# Altium PCB touch-1ch-sp.PcbDoc (part 3 of 3)
Units mm, origin at the board's own origin, x right, y up, seen from the top; angles counter-clockwise.
Board outline 151 x 86.38 mm, 2 copper layers (Top Layer, Bottom Layer); 26 components, 28 nets, 76 pads, 0 vias.
Unrouted connection lines stored in the file: 1.
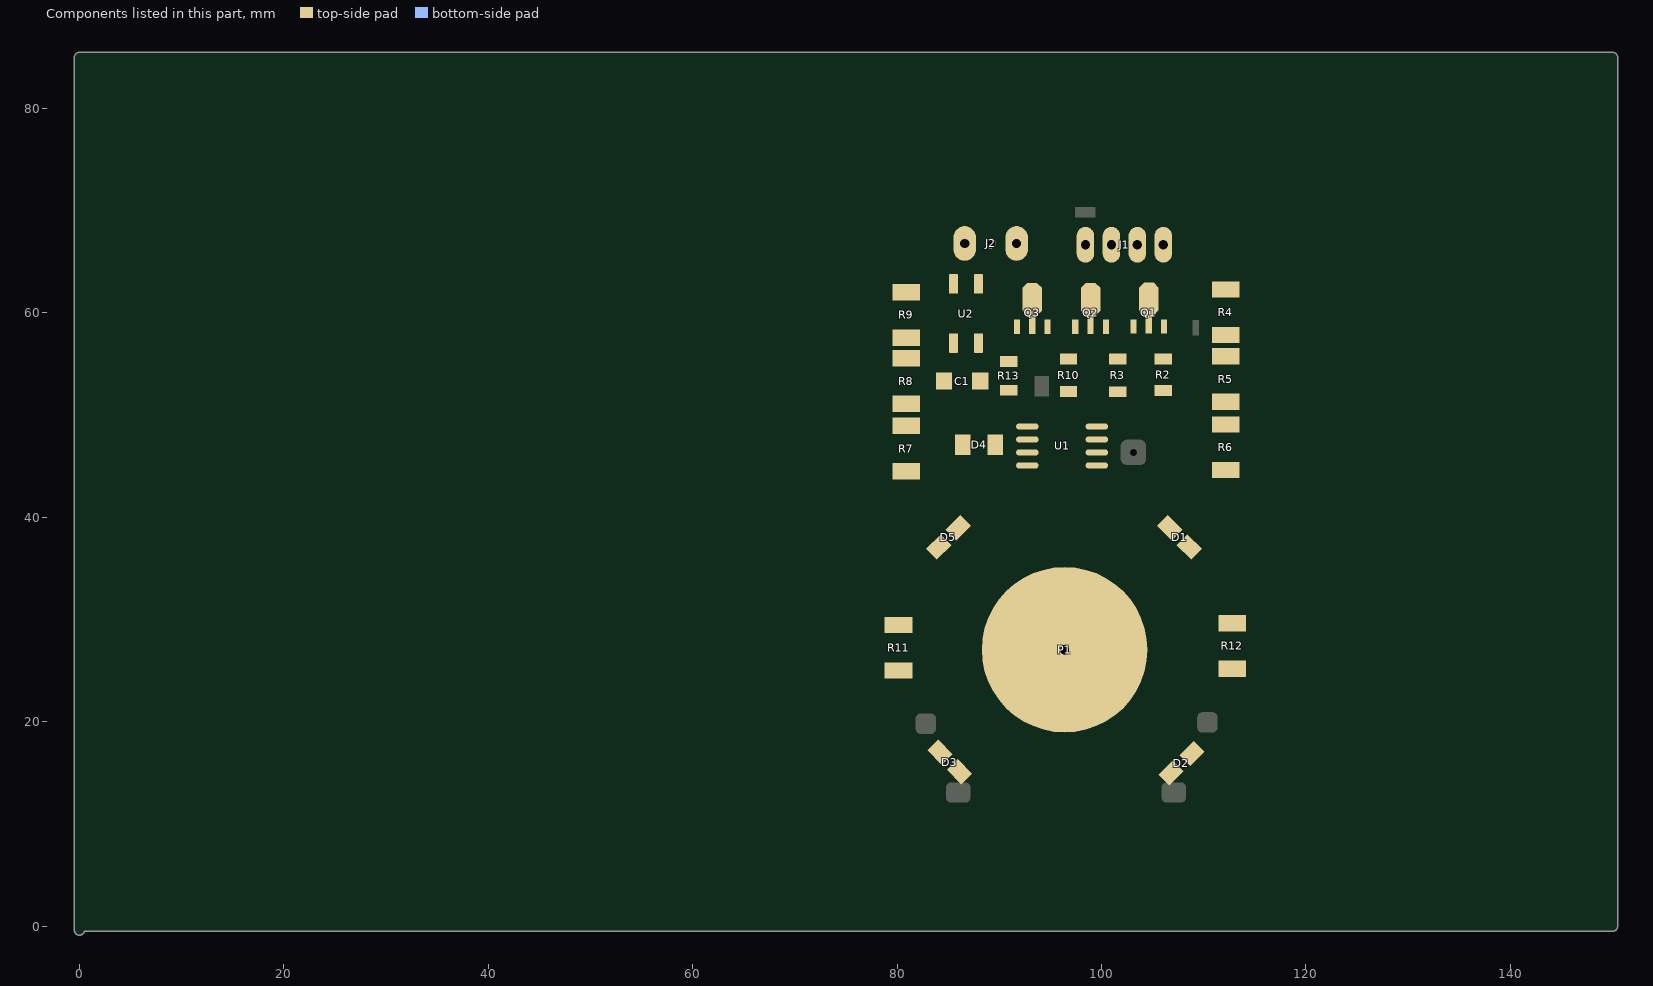
[diagram p3: the components of this part, seen from the top]

## Nets (pads, with @x,y where several pads share a name; then routed paths per layer and width w, separated by ;. In a path a pad name is that pad's centre, name@x,y a point inside that pad or via, vN(x,y) a via of type N, cw(c..) or ccw(c..) an arc to the next point about the centre after c; other vN are vias at no path point) (continued)
copper on no net: (continued)
  Top Layer w0.5: 49.714,6.006 49.714,6.004 49.714,6.003 49.714,6.001 49.714,5.999 49.714,5.998 49.714,5.996 49.714,5.995 49.714,5.993 49.714,5.992 49.714,5.99 49.714,5.989 49.714,5.987 49.714,5.986 49.714,5.984 49.714,5.982 49.714,5.981 49.714,5.979 49.714,5.978 49.714,5.976 49.714,5.975 49.714,5.973 49.714,5.972 49.714,5.97 49.714,5.969 49.713,5.967 49.713,5.966 49.713,5.964 49.713,5.963 49.713,5.961 49.713,5.96 49.713,5.958 49.713,5.957 49.713,5.955 49.713,5.954 49.713,5.952 49.713,5.951 49.713,5.949 49.713,5.948 49.713,5.946 49.713,5.945 49.713,5.943 49.713,5.942 49.713,5.94 49.713,5.939 49.713,5.937 49.713,5.936 49.713,5.934 49.713,5.933 49.713,5.932 49.713,5.93 49.713,5.929 49.713,5.927 49.712,5.926 49.712,5.924 49.712,5.923 49.712,5.921 49.712,5.92 49.712,5.919 49.712,5.917 49.712,5.916 49.712,5.914 49.712,5.913 49.712,5.911 49.712,5.91 49.712,5.909 49.712,5.907 49.712,5.906 49.712,5.904 49.712,5.903 49.712,5.901 49.712,5.9 49.712,5.899 49.712,5.897 49.712,5.896 49.712,5.894 49.712,5.893 49.712,5.892 49.712,5.89 49.712,5.889 49.712,5.887 49.712,5.886 49.712,5.885 49.712,5.883 49.712,5.882 49.711,5.881 49.711,5.879 49.711,5.878 49.711,5.876 49.711,5.875 49.711,5.874 49.711,5.872 49.711,5.871 49.711,5.87 49.711,5.868 49.711,5.867 49.711,5.866 49.711,5.864 49.711,5.863 49.711,5.861 49.711,5.857 49.711,5.851 49.711,5.844 49.711,5.838 49.711,5.832 49.71,5.825 49.71,5.819 49.71,5.813 49.71,5.807 49.71,5.8 49.71,5.794 49.71,5.788 49.709,5.782 49.709,5.775 49.709,5.769 49.709,5.763 49.709,5.756 49.709,5.75 49.709,5.744 49.708,5.737 49.708,5.731 49.708,5.725 49.708,5.719 49.708,5.712 49.708,5.706 49.707,5.7 49.707,5.693 49.707,5.687 49.707,5.681 49.707,5.674 49.707,5.668 49.707,5.662 49.706,5.656 49.706,5.649 49.706,5.643 49.706,5.637 49.706,5.63 49.706,5.624 49.705,5.62 49.705,5.616 49.705,5.611 49.705,5.607 49.705,5.603 49.705,5.599 49.705,5.594 49.705,5.59 49.704,5.586 49.704,5.582 49.704,5.578 49.704,5.573 49.704,5.569 49.704,5.565 49.704,5.561 49.704,5.557 49.703,5.552 49.703,5.548 49.703,5.544 49.703,5.54 49.703,5.535 49.703,5.531 49.703,5.527 49.703,5.523 49.702,5.519 49.702,5.514 49.702,5.51 49.702,5.506 49.702,5.502 49.702,5.497 49.702,5.493 49.702,5.489 49.701,5.485 49.701,5.481 49.701,5.476 49.701,5.472 49.701,5.468 49.701,5.464 49.701,5.459 49.701,5.455 49.7,5.451 49.7,5.447 49.7,5.442 49.7,5.438 49.7,5.434 49.7,5.43 49.7,5.426 49.7,5.421 49.699,5.417 49.699,5.413 49.699,5.409 49.699,5.404 49.699,5.4 49.699,5.396 49.699,5.394 49.699,5.392 49.699,5.39 49.698,5.387 49.698,5.385 49.698,5.383 49.698,5.381 49.698,5.379 49.698,5.377 49.698,5.375 49.698,5.373 49.698,5.37 49.698,5.368 49.698,5.366 49.698,5.364 49.698,5.362 49.698,5.36 49.698,5.358 49.697,5.356 49.697,5.354 49.697,5.351 49.697,5.349 49.697,5.347 49.697,5.345 49.697,5.343 49.697,5.341 49.697,5.339 49.697,5.337 49.697,5.334 49.697,5.332 49.697,5.33 49.697,5.328 49.696,5.326 49.696,5.324 49.696,5.322 49.696,5.32 49.696,5.317 49.696,5.315 49.696,5.313 49.696,5.311 49.696,5.309 49.696,5.307 49.696,5.305 49.696,5.303 49.696,5.301 49.696,5.298 49.696,5.296 49.695,5.294 49.695,5.292 49.695,5.29 49.695,5.288 49.695,5.286 49.695,5.284 49.695,5.281 49.695,5.279 49.695,5.277 49.695,5.275 49.695,5.273 49.695,5.271 49.695,5.269 49.695,5.267 49.694,5.264 49.694,5.262 49.694,5.26 49.694,5.258 49.694,5.256 49.694,5.254 49.694,5.252 49.694,5.25 49.694,5.247 49.694,5.245 49.694,5.243 49.694,5.241 49.694,5.239 49.694,5.237 49.694,5.235 49.693,5.233 49.693,5.23 49.693,5.228 49.693,5.226 49.693,5.224 49.693,5.222 49.693,5.22 49.693,5.218 49.693,5.216 49.693,5.213 49.693,5.211 49.693,5.209 49.693,5.207 49.693,5.205 49.692,5.203 49.692,5.201 49.692,5.199 49.692,5.196 49.692,5.194 49.692,5.192 49.692,5.19 49.692,5.188 49.692,5.186 49.692,5.184 49.692,5.182 49.692,5.18 49.692,5.177 49.692,5.175 49.691,5.173 49.691,5.171 49.691,5.169 49.691,5.167 49.691,5.165 49.691,5.163 49.691,5.16 49.691,5.158 49.691,5.156 49.691,5.154 49.691,5.152 49.691,5.15 49.691,5.148 49.691,5.146 49.691,5.143 49.69,5.141 49.69,5.139 49.69,5.137 49.69,5.135 49.69,5.133 49.69,5.131 49.69,5.128 49.69,5.126 49.69,5.124 49.69,5.122 49.69,5.12 49.69,5.118 49.69,5.116 49.69,5.114 49.689,5.111 49.689,5.109 49.689,5.107 49.689,5.105 49.689,5.103 49.689,5.101 49.689,5.099 49.689,5.097 49.689,5.094 49.689,5.092 49.689,5.09 49.689,5.088 49.689,5.086 49.689,5.084 49.688,5.082 49.688,5.08 49.688,5.077 49.688,5.075 49.688,5.073 49.688,5.071 49.688,5.069 49.688,5.067 49.688,5.065 49.688,5.063 49.688,5.06 49.688,5.058 49.688,5.056 49.688,5.054 49.688,5.052 49.687,5.05 49.687,5.048 49.687,5.046 49.687,5.043 49.687,5.041 49.687,5.039 49.687,5.037 49.687,5.035 49.687,5.033 49.687,5.031 49.687,5.029 49.687,5.026 49.687,5.024 49.687,5.022 49.686,5.02 49.686,5.018 49.686,5.016 49.686,5.014 49.686,5.012 49.686,5.009 49.686,5.007 49.686,5.005 49.686,5.003 49.686,5.001 49.686,4.999 49.686,4.997 49.686,4.994 49.686,4.992 49.686,4.99 49.685,4.988 49.685,4.986 49.685,4.984 49.685,4.982 49.685,4.98 49.685,4.977 49.685,4.975 49.685,4.973 49.685,4.971 49.685,4.967 49.685,4.963 49.685,4.958 49.684,4.954 49.684,4.95 49.684,4.946 49.684,4.941 49.684,4.937 49.684,4.933 49.684,4.929 49.683,4.924 49.683,4.92 49.683,4.916 49.683,4.911 49.683,4.907 49.683,4.903 49.683,4.899 49.683,4.894 49.682,4.89 49.682,4.886 49.682,4.882 49.682,4.877 49.682,4.873 49.682,4.869 49.682,4.865 49.681,4.86 49.681,4.856 49.681,4.852 49.681,4.848 49.681,4.843 49.681,4.839 49.681,4.835 49.681,4.831 49.68,4.826 49.68,4.822 49.68,4.818 49.68,4.814 49.68,4.809 49.68,4.805 49.68,4.801 49.68,4.797 49.679,4.792 49.679,4.788 49.679,4.784 49.679,4.779 49.679,4.775 49.679,4.771 49.679,4.767 49.679,4.762 49.679,4.758 49.678,4.754 49.678,4.748 49.678,4.741 49.678,4.735 49.678,4.728 49.678,4.722 49.677,4.716 49.677,4.709 49.677,4.703 49.677,4.696 49.677,4.69 49.677,4.684 49.676,4.677 49.676,4.671 49.676,4.665 49.676,4.658 49.676,4.652 49.676,4.645 49.675,4.639 49.675,4.633 49.675,4.626 49.675,4.62 49.675,4.614 49.675,4.607 49.674,4.601 49.674,4.594 49.674,4.588 49.674,4.582 49.674,4.575 49.674,4.569 49.674,4.562 49.673,4.556 49.673,4.55 49.673,4.543 49.673,4.537 49.673,4.531 49.673,4.522 49.673,4.514 49.672,4.505 49.672,4.497 49.672,4.488 49.672,4.48 49.672,4.471 49.672,4.463 49.671,4.454 49.671,4.446 49.671,4.437 49.671,4.429 49.671,4.42 49.671,4.412 49.671,4.403 49.67,4.395 49.67,4.386 49.67,4.378 49.67,4.369 49.67,4.361 49.67,4.352 49.67,4.344 49.67,4.335 49.67,4.327 49.669,4.318 49.669,4.31 49.669,4.302 49.669,4.293 49.669,4.285 49.669,4.274 49.669,4.263 49.669,4.253 49.669,4.242 49.669,4.232 49.669,4.221 49.668,4.211 49.668,4.2 49.668,4.189 49.668,4.179 49.668,4.168 49.668,4.158 49.668,4.147 49.668,4.137 49.668,4.126 49.668,4.116 ccw(c65.585,4.11) 49.668,4.105 49.668,4.095 49.668,4.084 49.668,4.073 49.668,4.063 49.668,4.052 49.668,4.042 49.668,4.031 49.668,4.021 49.668,4.01 49.669,4 49.669,3.987 49.669,3.975 49.669,3.962 49.669,3.95 49.669,3.937 49.669,3.924 49.669,3.912 49.67,3.899 49.67,3.887 49.67,3.874 49.67,3.862 49.67,3.849 49.671,3.837 49.671,3.824 49.671,3.811 49.671,3.799 49.672,3.786 49.672,3.774 49.672,3.761 49.673,3.747 49.674,3.704 ccw(c53.661,3.855) 49.678,3.626 ccw(c53.618,3.852) 49.683,3.548 ccw(c53.578,3.849) 49.69,3.471 ccw(c53.538,3.845) 49.699,3.388 ccw(c53.498,3.84) 49.709,3.307 ccw(c53.46,3.835) 49.723,3.22 ccw(c53.42,3.828) 49.739,3.128 ccw(c53.382,3.821) 49.757,3.038 ccw(c53.345,3.813) 49.779,2.943 ccw(c53.309,3.804) 49.805,2.843 ccw(c53.273,3.794) 49.835,2.74 ccw(c53.238,3.784) 49.87,2.633 ccw(c53.204,3.772) 49.911,2.517 ccw(c53.17,3.759) 49.961,2.393 ccw(c53.137,3.745) 50.023,2.258 ccw(c53.105,3.73) 50.097,2.111 ccw(c53.074,3.713) 50.192,1.946 ccw(c53.045,3.695) 50.324,1.747 ccw(c53.001,3.662) 51.138,0.948 ccw(c53.012,3.679) 51.433,0.768 ccw(c53.029,3.709) 51.632,0.668 ccw(c53.043,3.74) 51.798,0.597 ccw(c53.056,3.772) 51.942,0.544 ccw(c53.067,3.805) 52.075,0.501 ccw(c53.077,3.839) 52.193,0.468 ccw(c53.086,3.874) 52.302,0.441 ccw(c53.094,3.909) 52.408,0.419 ccw(c53.102,3.945) 52.509,0.4 ccw(c53.108,3.983) 52.605,0.386 ccw(c53.113,4.02) 52.697,0.374 ccw(c53.118,4.059) 52.784,0.365 ccw(c53.121,4.096) 52.865,0.359 ccw(c53.124,4.135) 52.948,0.354 ccw(c53.125,4.174) 53.025,0.351 ccw(c53.126,4.214) 53.102,0.35 ccw(c53.127,4.254) 53.174,0.35 ccw(c53.126,4.294) 53.247,0.352 ccw(c53.125,4.338) 53.325,0.355 ccw(c53.149,3.851) 53.399,0.359 ccw(c53.152,3.821) 53.51,0.369 ccw(c53.155,3.786) 53.638,0.385 ccw(c53.16,3.751) 53.788,0.409 ccw(c53.176,3.679) 54.853,0.806 ccw(c53.157,3.712) 55.028,0.916 ccw(c53.138,3.741) 55.16,1.009 ccw(c53.117,3.769) 55.271,1.094 ccw(c53.095,3.796) 55.366,1.174 ccw(c53.072,3.823) 55.45,1.249 ccw(c53.048,3.848) 55.527,1.322 ccw(c53.023,3.874) 55.597,1.393 ccw(c52.997,3.899) 55.662,1.462 ccw(c52.97,3.924) 55.726,1.534 55.748,1.559 55.768,1.585 55.782,1.602 55.824,1.656 55.866,1.71 55.908,1.764 55.951,1.817 55.993,1.871 56.035,1.925 56.077,1.978 56.119,2.032 56.161,2.086 56.203,2.139 56.245,2.193 56.288,2.247 56.33,2.301 56.372,2.354 56.4,2.39 56.428,2.426 56.456,2.462 56.484,2.497 56.512,2.533 56.54,2.569 56.568,2.605 56.596,2.641 56.625,2.676 56.653,2.712 56.681,2.748 56.709,2.784 56.737,2.82 56.765,2.855 56.793,2.891 56.821,2.927 56.849,2.963 56.877,2.999 56.905,3.034 56.933,3.07 56.961,3.106 56.99,3.142 57.018,3.178 57.046,3.214 57.074,3.249 57.102,3.285 57.13,3.321 57.158,3.357 57.186,3.393 57.214,3.428 57.242,3.464 57.27,3.5 57.298,3.536 57.326,3.572 57.354,3.607 57.383,3.643 57.411,3.679 57.439,3.715 57.467,3.751 57.495,3.786 57.523,3.822 57.551,3.858 57.579,3.894 57.607,3.93 57.635,3.966 57.663,4.001 57.691,4.037 57.719,4.073 57.747,4.109 57.775,4.145 57.79,4.163 57.804,4.18 57.818,4.198 57.832,4.216 57.846,4.234 57.86,4.252 57.874,4.27 57.888,4.288 57.902,4.306 57.916,4.324 57.93,4.342 57.944,4.36 57.958,4.377 57.972,4.395 57.986,4.413 58,4.431 58.014,4.449 58.028,4.467 58.042,4.485 58.056,4.503 58.07,4.521 58.084,4.539 58.098,4.557 58.112,4.574 58.126,4.592 58.14,4.61 58.154,4.628 58.168,4.646 58.182,4.664 58.196,4.682 58.21,4.7 58.224,4.718 58.239,4.736 58.253,4.754 58.267,4.771 58.281,4.789 58.295,4.807 58.309,4.825 58.323,4.843 58.337,4.861 58.351,4.879 58.365,4.897 58.379,4.915 58.393,4.933 58.407,4.951 58.421,4.968 58.435,4.986 58.449,5.004 58.463,5.022 58.477,5.04 58.491,5.058 58.505,5.076 58.519,5.094 58.533,5.112 58.547,5.13 58.561,5.148 58.575,5.165 58.589,5.183 58.603,5.201 58.617,5.219 58.631,5.237 58.645,5.255 58.659,5.273 58.673,5.291 58.687,5.309 58.702,5.327 58.716,5.345 58.73,5.362 58.744,5.38 58.758,5.398 58.772,5.416 58.786,5.434 58.8,5.452 58.814,5.47 58.828,5.488 58.842,5.506 58.856,5.524 58.87,5.542 58.884,5.559 58.898,5.577 58.912,5.595 58.926,5.613 58.94,5.631 58.954,5.649 58.968,5.667 58.982,5.685 58.996,5.703 59.01,5.721 59.024,5.739 59.038,5.756 59.052,5.774 59.066,5.792 59.08,5.81 59.094,5.828 59.108,5.846 59.122,5.864 59.136,5.882 59.15,5.9 59.164,5.918 59.179,5.936 59.193,5.953 59.207,5.971 59.221,5.989 59.235,6.007 59.249,6.025 59.263,6.043 59.277,6.061 59.291,6.079 59.305,6.097 59.319,6.115 59.333,6.133 59.347,6.151 59.361,6.168 59.375,6.186 59.389,6.204 59.403,6.222 59.417,6.24 59.431,6.258 59.445,6.276 59.459,6.294 59.473,6.312 59.487,6.33 59.501,6.348 59.515,6.365 59.529,6.383 59.543,6.401 59.557,6.419 59.571,6.437 59.585,6.455 59.599,6.473 59.613,6.491 59.627,6.509 59.641,6.527 59.656,6.545 59.67,6.562 59.684,6.58 59.698,6.598 59.712,6.616 59.726,6.634 59.74,6.652 59.754,6.67 59.768,6.688 59.782,6.706 59.796,6.724 59.81,6.742 59.824,6.759 59.838,6.777 59.852,6.795 59.866,6.813 59.88,6.831 59.894,6.849 59.908,6.867 59.922,6.885 59.936,6.903 59.95,6.921 59.964,6.939 59.978,6.956 59.992,6.974 60.006,6.992 60.02,7.01 60.034,7.028 60.048,7.046 60.062,7.064 60.076,7.082 60.09,7.1 60.104,7.118 60.118,7.136 60.133,7.153 60.147,7.171 60.161,7.189 60.175,7.207 60.189,7.225 60.203,7.243 60.217,7.261 60.231,7.279 60.245,7.297 60.259,7.315 60.273,7.333 60.287,7.35 60.301,7.368 60.315,7.386 60.329,7.404 60.343,7.422 60.357,7.44 60.371,7.458 60.385,7.476 60.399,7.494 60.413,7.512 60.427,7.53 60.441,7.547 60.455,7.565 60.469,7.583 60.483,7.601 60.497,7.619 60.511,7.637 60.525,7.655 60.539,7.673 60.553,7.691 60.568,7.709 60.582,7.727 60.61,7.762 60.638,7.798 60.666,7.834 60.694,7.87 60.722,7.906 60.75,7.941 60.778,7.977 60.806,8.013 60.834,8.049 60.862,8.085 60.89,8.12 60.918,8.156 60.946,8.192 60.974,8.228 61.003,8.264 61.031,8.3 61.059,8.335 61.087,8.371 61.115,8.407 61.143,8.443 61.171,8.479 61.199,8.514 61.227,8.55 61.255,8.586 61.283,8.622 61.311,8.658 61.339,8.693 61.367,8.729 61.396,8.765 61.424,8.801 61.452,8.837 61.48,8.873 61.508,8.908 61.536,8.944 61.564,8.98 61.592,9.016 61.62,9.052 61.648,9.087 61.676,9.123 61.704,9.159 61.732,9.195 61.761,9.231 61.789,9.266 61.817,9.302 61.845,9.338 61.873,9.374 61.901,9.41 61.929,9.445 61.957,9.481 61.985,9.517 62.027,9.571 62.069,9.624 62.112,9.678 62.154,9.732 62.196,9.785 62.238,9.839 62.28,9.893 62.322,9.947 62.364,10 62.407,10.054 62.449,10.108 62.491,10.161 62.533,10.215 62.575,10.269 62.617,10.322 62.659,10.376 62.702,10.43 62.744,10.483 62.786,10.537 62.828,10.591 62.87,10.644 62.912,10.698 62.954,10.752 62.997,10.806 63.039,10.859 63.081,10.913 63.123,10.967 63.165,11.02 63.207,11.074 63.25,11.128 63.292,11.181 63.334,11.235 63.376,11.289 63.432,11.36 63.489,11.432 63.545,11.503 63.601,11.575 63.657,11.646 63.714,11.718 63.77,11.789 63.826,11.861 63.882,11.932 63.939,12.004 63.995,12.076 64.051,12.147 64.107,12.219 64.164,12.29 64.22,12.362 64.276,12.433 64.332,12.505 64.389,12.576 64.445,12.648 64.501,12.719 64.558,12.791 64.614,12.862 64.67,12.934 64.727,13.005 64.783,13.077 64.853,13.166 64.924,13.255 64.994,13.345 65.065,13.434 65.135,13.523 65.205,13.613 65.276,13.702 65.346,13.791 65.417,13.881 65.487,13.97 65.558,14.059 65.628,14.148 65.699,14.238 65.769,14.327 65.84,14.416 65.91,14.506 65.981,14.595 66.051,14.684 66.122,14.773 66.192,14.863 66.277,14.97 66.362,15.077 66.446,15.184 66.531,15.291 66.616,15.398 66.7,15.505 66.785,15.612 66.87,15.719 66.954,15.826 67.039,15.933 67.124,16.04 67.209,16.147 67.294,16.254 67.378,16.361 67.463,16.468 67.548,16.575 67.647,16.7 67.746,16.824 67.845,16.949 67.944,17.074 68.043,17.198 68.142,17.323 68.241,17.448 68.341,17.572 68.44,17.697 68.539,17.822 68.638,17.946 68.737,18.071 68.837,18.195 68.936,18.32 69.035,18.444 69.149,18.587 69.262,18.729 69.376,18.871 69.489,19.013 69.603,19.156 69.716,19.298 69.844,19.458 69.861,19.479 69.889,19.514 69.916,19.549 69.943,19.583 69.969,19.618 69.996,19.653 70.022,19.688 70.047,19.723 70.072,19.758 70.097,19.792 70.122,19.827 70.147,19.862 70.171,19.897 70.194,19.932 70.218,19.966 70.241,20.001 70.263,20.036 70.286,20.071 70.308,20.105 70.33,20.14 70.351,20.175 70.373,20.209 70.393,20.244 70.414,20.279 70.434,20.313 70.454,20.348 70.474,20.382 70.497,20.424 70.52,20.466 70.542,20.507 70.564,20.549 70.585,20.59 70.606,20.631 70.627,20.673 70.647,20.714 70.667,20.756 70.686,20.797 70.708,20.846 70.729,20.894 70.75,20.942 70.77,20.99 70.789,21.039 70.811,21.094 70.832,21.149 70.852,21.204 70.871,21.259 70.892,21.321 70.912,21.383 70.933,21.451 70.955,21.527 ccw(c66.507,22.773) 70.977,21.61 ccw(c66.554,22.76) 71,21.699 ccw(c66.601,22.749) 71.023,21.802 ccw(c66.648,22.739) 71.049,21.932 ccw(c66.721,22.727) 71.117,22.535 ccw(c66.695,22.728) 71.121,22.727 ccw(c66.648,22.728) 71.119,22.857 ccw(c66.602,22.726) 71.115,22.959 ccw(c66.556,22.724) 71.11,23.048 ccw(c66.509,22.721) 71.103,23.13 71.096,23.205 71.088,23.274 71.08,23.342 71.071,23.404 71.061,23.465 71.052,23.52 71.042,23.575 71.032,23.629 71.021,23.684 71.011,23.732 71,23.78 70.989,23.828 70.977,23.876 70.965,23.923 70.953,23.971 70.942,24.012 70.93,24.053 70.918,24.094 70.906,24.136 70.894,24.177 70.881,24.218 70.868,24.259 70.854,24.3 70.841,24.341 70.826,24.382 70.812,24.423 70.797,24.464 70.782,24.505 70.769,24.54 70.756,24.574 70.743,24.608 70.729,24.642 70.715,24.677 70.701,24.711 70.687,24.745 70.673,24.779 70.658,24.814 70.643,24.848 70.628,24.882 70.613,24.917 70.597,24.951 70.581,24.985 70.565,25.02 70.549,25.054 70.533,25.088 70.516,25.123 70.499,25.157 70.482,25.191 70.465,25.226 70.447,25.26 70.429,25.294 70.411,25.329 70.393,25.363 70.375,25.398 70.356,25.432 70.338,25.466 70.319,25.501 70.299,25.535 70.28,25.57 70.26,25.604 70.24,25.638 70.22,25.673 70.2,25.707 70.18,25.742 70.159,25.776 70.138,25.811 70.117,25.845 70.096,25.88 70.074,25.914 70.053,25.949 70.031,25.983 70.009,26.018 69.987,26.052 69.964,26.087 69.941,26.121 69.919,26.156 69.896,26.19 69.872,26.225 69.849,26.26 69.825,26.294 69.797,26.336 69.787,26.349 69.771,26.373 69.755,26.396 69.738,26.42 69.722,26.443 69.705,26.467 69.688,26.491 69.672,26.514 69.655,26.538 69.638,26.561 69.622,26.585 69.605,26.608 69.588,26.632 69.571,26.655 69.554,26.679 69.537,26.702 69.522,26.723 69.507,26.744 69.492,26.765 69.477,26.786 69.462,26.807 69.447,26.827 69.432,26.848 69.416,26.869 69.401,26.89 69.386,26.91 69.371,26.931 69.355,26.952 69.34,26.973 69.325,26.993 69.309,27.014 69.294,27.035 69.278,27.055 69.265,27.074 69.251,27.092 69.238,27.11 69.224,27.128 69.211,27.146 69.197,27.164 69.184,27.182 69.17,27.2 69.156,27.218 69.143,27.236 69.129,27.254 69.116,27.272 69.102,27.29 69.088,27.308 69.074,27.326 69.061,27.344 69.047,27.362 69.033,27.38 69.022,27.395 69.01,27.411 68.998,27.426 68.986,27.442 68.974,27.457 68.963,27.472 68.951,27.488 68.939,27.503 68.927,27.518 68.915,27.534 68.903,27.549 68.892,27.565 68.88,27.58 68.868,27.595 68.856,27.611 68.844,27.626 68.832,27.641 68.82,27.656 68.808,27.672 68.798,27.685 68.788,27.697 68.778,27.71 68.769,27.723 68.759,27.736 68.749,27.748 68.739,27.761 68.729,27.774 68.719,27.786 68.709,27.799 68.699,27.812 68.689,27.825 68.679,27.837 68.669,27.85 68.659,27.863 68.649,27.875 68.639,27.888 68.629,27.901 68.619,27.913 68.609,27.926 68.599,27.939 68.591,27.949 68.583,27.959 68.575,27.969 68.567,27.979 68.559,27.99 68.551,28 68.543,28.01 68.535,28.02 68.527,28.03 68.519,28.04 68.511,28.05 68.503,28.06 68.495,28.071 68.487,28.081 68.479,28.091 68.471,28.101 68.462,28.111 68.454,28.121 68.446,28.131 68.438,28.141 68.43,28.151 68.422,28.162 68.414,28.172 68.406,28.182 68.398,28.192 68.39,28.202 68.384,28.209 68.378,28.217 68.372,28.225 68.366,28.232 68.36,28.24 68.354,28.247 68.348,28.255 68.342,28.262 68.336,28.27 68.33,28.278 68.324,28.285 68.318,28.293 68.312,28.3 68.306,28.308 68.3,28.315 68.293,28.323 68.287,28.33 68.281,28.338 68.275,28.345 68.269,28.353 68.263,28.361 68.257,28.368 68.251,28.376 68.245,28.383 68.239,28.391 68.233,28.398 68.227,28.406 68.221,28.413 68.215,28.421 68.209,28.428 68.203,28.436 68.197,28.443 68.191,28.451 68.187,28.456 68.183,28.461 68.179,28.466 68.175,28.471 68.171,28.476 68.167,28.481 68.162,28.486 68.158,28.491 68.154,28.496 68.15,28.501 68.146,28.506 68.142,28.511 68.138,28.516 68.134,28.521 68.13,28.526 68.126,28.531 68.122,28.536 68.118,28.541 68.114,28.546 68.11,28.551 68.106,28.556 68.102,28.561 68.098,28.566 68.094,28.571 68.09,28.576 68.086,28.581 68.082,28.586 68.078,28.591 68.074,28.596 68.07,28.601 68.066,28.606 68.062,28.611 68.058,28.616 68.054,28.621 68.05,28.626 68.046,28.631 68.042,28.636 68.038,28.641 68.033,28.646 68.029,28.651 68.025,28.656 68.021,28.661 68.017,28.666 68.013,28.671 68.009,28.676 68.005,28.681 68.001,28.686 67.997,28.691 67.993,28.696 67.989,28.701 67.987,28.704 67.985,28.706 67.983,28.709 67.981,28.711 67.979,28.714 67.977,28.716 67.975,28.719 67.973,28.721 67.971,28.724 67.969,28.726 67.967,28.729 67.965,28.731 67.963,28.734 67.961,28.736 67.959,28.739 67.957,28.741 67.955,28.744 67.953,28.746 67.951,28.749 67.949,28.751 67.947,28.754 67.945,28.756 67.943,28.759 67.941,28.761 67.939,28.764 67.937,28.766 67.935,28.769 67.933,28.771 67.931,28.774 67.929,28.776 67.927,28.779 67.925,28.781 67.923,28.784 67.921,28.786 67.919,28.789 67.917,28.791 67.915,28.794 67.913,28.796 67.911,28.799 67.909,28.801 67.907,28.804 67.905,28.806 67.903,28.809 67.901,28.811 67.899,28.814 67.897,28.816 67.895,28.819 67.893,28.821 67.89,28.824 67.888,28.826 67.886,28.829 67.884,28.831 67.882,28.834 67.88,28.836 67.878,28.839 67.876,28.841 67.874,28.843 67.872,28.846 67.87,28.848 67.868,28.851 67.866,28.853 67.864,28.856 67.862,28.858 67.86,28.861 67.858,28.863 67.856,28.866 67.854,28.868 67.852,28.871 67.85,28.873 67.848,28.876 67.846,28.878 67.844,28.881 67.842,28.883 67.84,28.886 67.836,28.891 67.827,28.903 67.812,28.921 67.798,28.939 67.783,28.957 67.769,28.974 67.754,28.992 67.74,29.01 67.725,29.028 67.711,29.046 67.696,29.064 67.682,29.082 67.667,29.1 67.655,29.115 67.643,29.13 67.631,29.144 67.619,29.159 67.607,29.174 67.595,29.189 67.583,29.204 67.57,29.219 67.558,29.234 67.546,29.249 67.534,29.264 67.522,29.279 67.51,29.294 67.498,29.308 67.486,29.323 67.474,29.338 67.462,29.353 67.449,29.368 67.437,29.383 67.425,29.398 67.415,29.41 67.406,29.422 67.396,29.434 67.386,29.445 67.377,29.457 67.367,29.469 67.357,29.481 67.348,29.493 67.338,29.505 67.328,29.517 67.319,29.529 67.309,29.541 67.299,29.553 67.289,29.565 67.28,29.576 67.27,29.588 67.26,29.6 67.251,29.612 67.241,29.624 67.231,29.636 67.221,29.648 67.212,29.66 67.202,29.672 67.192,29.684 67.183,29.695 67.175,29.704 67.168,29.713 67.161,29.722 67.153,29.731 67.146,29.74 67.139,29.749 67.132,29.758 67.124,29.767 67.117,29.776 67.11,29.785 67.102,29.794 67.095,29.802 67.088,29.811 67.081,29.82 67.073,29.829 67.066,29.838 67.059,29.847 67.051,29.856 67.044,29.865 67.037,29.874 67.03,29.883 67.022,29.892 67.015,29.901 67.008,29.909 67,29.918 66.993,29.927 66.986,29.936 66.979,29.945 66.971,29.954 66.964,29.963 66.957,29.972 66.949,29.981 66.942,29.99 66.935,29.999 66.93,30.005 66.925,30.011 66.92,30.016 66.915,30.022 66.91,30.028 66.906,30.034 66.901,30.04 66.896,30.046 66.891,30.052 66.886,30.058 66.881,30.064 66.876,30.07 66.872,30.076 66.867,30.082 66.862,30.088 66.857,30.094 66.852,30.1 66.847,30.106 66.842,30.112 66.838,30.117 66.833,30.123 66.828,30.129 66.823,30.135 66.818,30.141 66.813,30.147 66.808,30.153 66.803,30.159 66.799,30.165 66.794,30.171 66.789,30.177 66.784,30.183 66.779,30.189 66.774,30.195 66.769,30.201 66.765,30.207 66.76,30.213 66.755,30.218 66.75,30.224 66.745,30.23 66.74,30.236 66.735,30.242 66.731,30.248 66.726,30.254 66.721,30.26 66.716,30.266 66.711,30.272 66.706,30.278 66.701,30.284 66.696,30.29 66.692,30.296 66.689,30.299 66.687,30.302 66.684,30.305 66.682,30.308 66.679,30.311 66.677,30.314 66.675,30.317 66.672,30.319 66.67,30.322 66.667,30.325 66.665,30.328 66.662,30.331 66.66,30.334 66.658,30.337 66.655,30.34 66.653,30.343 66.65,30.346 66.648,30.349 66.645,30.352 66.643,30.355 66.64,30.358 66.638,30.361 66.636,30.364 66.633,30.367 66.631,30.37 66.628,30.373 66.626,30.376 66.623,30.379 66.621,30.382 66.619,30.385 66.616,30.388 66.614,30.391 66.611,30.394 66.609,30.397 66.606,30.4 66.604,30.403 66.602,30.406 66.599,30.409 66.597,30.412 66.594,30.415 66.592,30.417 66.589,30.42 66.587,30.423 66.585,30.426 66.582,30.429 66.58,30.432 66.577,30.435 66.575,30.438 66.572,30.441 66.57,30.444 66.567,30.447 66.565,30.45 66.563,30.453 66.56,30.456 66.558,30.459 66.555,30.462 66.553,30.465 66.55,30.468 66.548,30.471 66.546,30.474 66.543,30.477 66.541,30.48 66.538,30.483 66.536,30.486 66.533,30.489 66.531,30.492 66.529,30.495 66.526,30.498 66.524,30.501 66.521,30.504 66.519,30.507 66.516,30.51 66.514,30.513 66.512,30.515 66.509,30.518 66.507,30.521 66.504,30.524 66.502,30.527 66.499,30.53 66.497,30.533 66.494,30.536 66.492,30.539 66.49,30.542 66.487,30.545 66.485,30.548 66.482,30.551 66.48,30.554 66.477,30.557 66.475,30.56 66.473,30.563 66.47,30.566 66.468,30.569 66.465,30.572 66.463,30.575 66.46,30.578 66.458,30.581 66.456,30.584 66.453,30.587 66.451,30.59 66.448,30.593 66.446,30.596 66.443,30.599 66.441,30.602 66.438,30.605 66.436,30.608 66.434,30.61 66.431,30.613 66.429,30.616 66.426,30.619 66.424,30.622 66.421,30.625 66.419,30.628 66.417,30.631 66.414,30.634 66.412,30.637 66.409,30.64 66.407,30.643 66.404,30.646 66.402,30.649 66.4,30.652 66.397,30.655 66.395,30.658 66.392,30.661 66.39,30.664 66.387,30.667 66.385,30.67 66.383,30.673 66.38,30.676 66.378,30.679 66.375,30.682 66.373,30.685 66.37,30.688 66.368,30.691 66.365,30.694 66.363,30.697 66.361,30.7 66.358,30.703 66.356,30.706 66.353,30.708 66.351,30.711 66.348,30.714 66.346,30.717 66.344,30.72 66.341,30.723 66.339,30.726 66.336,30.729 66.334,30.732 66.331,30.735 66.329,30.738 66.327,30.741 66.324,30.744 66.322,30.747 66.319,30.75 66.317,30.753 66.314,30.756 66.312,30.759 66.31,30.762 66.307,30.765 66.305,30.768 66.302,30.771 66.3,30.774 66.297,30.777 66.295,30.78 66.292,30.783 66.29,30.786 66.288,30.789 66.285,30.792 66.283,30.795 66.28,30.798 66.278,30.801 66.275,30.804 66.273,30.806 66.271,30.809 66.268,30.812 66.266,30.815 66.263,30.818 66.261,30.821 66.258,30.824 66.256,30.827 66.254,30.83 66.251,30.833 66.249,30.836 66.246,30.839 66.244,30.842 66.241,30.845 66.239,30.848 66.236,30.851 66.234,30.854 66.232,30.857 66.229,30.86 66.227,30.863 66.224,30.866 66.222,30.869 66.219,30.872 66.217,30.875 66.215,30.878 66.212,30.881 66.21,30.884 66.207,30.887 66.205,30.89 66.2,30.896 66.195,30.902 66.19,30.907 66.185,30.913 66.181,30.919 66.176,30.925 66.171,30.931 66.166,30.937 66.161,30.943 66.156,30.949 66.151,30.955 66.146,30.961 66.142,30.967 66.137,30.973 66.132,30.979 66.127,30.985 66.122,30.991 66.117,30.997 66.112,31.003 66.108,31.008 66.103,31.014 66.098,31.02 66.093,31.026 66.088,31.032 66.083,31.038 66.078,31.044 66.074,31.05 66.069,31.056 66.064,31.062 66.059,31.068 66.054,31.074 66.049,31.08 66.044,31.086 66.039,31.092 66.035,31.098 66.03,31.104 66.025,31.109 66.02,31.115 66.015,31.121 66.01,31.127 66.005,31.133 66.001,31.139 65.996,31.145 65.991,31.151 65.986,31.157 65.981,31.163 65.976,31.169 65.971,31.175 65.967,31.181 65.959,31.19 65.952,31.199 65.945,31.208 65.937,31.216 65.93,31.225 65.923,31.234 65.915,31.243 65.908,31.252 65.901,31.261 65.894,31.27 65.886,31.279 65.879,31.288 65.872,31.297 65.864,31.306 65.857,31.315 65.85,31.323 65.843,31.332 65.835,31.341 65.828,31.35 65.821,31.359 65.813,31.368 65.806,31.377 65.799,31.386 65.792,31.395 65.784,31.404 65.777,31.413 65.77,31.422 65.762,31.43 65.755,31.439 65.748,31.448 65.741,31.457 65.733,31.466 65.726,31.475 65.716,31.487 65.707,31.499 65.697,31.511 65.687,31.523 65.677,31.535 65.668,31.546 65.658,31.558 65.648,31.57 65.639,31.582 65.629,31.594 65.619,31.606 65.609,31.618 65.6,31.63 65.59,31.642 65.58,31.654 65.571,31.665 65.561,31.677 65.551,31.689 65.542,31.701 65.532,31.713 65.522,31.725 65.512,31.737 65.503,31.749 65.493,31.761 65.483,31.773 65.471,31.788 65.459,31.802 65.447,31.817 65.435,31.832 65.423,31.847 65.408,31.865 65.406,31.868 65.402,31.873 65.397,31.879 65.393,31.884 65.388,31.89 65.384,31.895 65.379,31.901 65.375,31.906 65.37,31.912 65.366,31.917 65.361,31.923 65.357,31.928 65.352,31.934 65.348,31.939 65.343,31.945 65.339,31.95 65.334,31.956 65.33,31.961 65.326,31.967 65.321,31.972 65.317,31.978 65.312,31.983 65.308,31.989 65.303,31.994 65.299,32 65.294,32.005 65.29,32.011 65.285,32.016 65.281,32.022 65.276,32.027 65.272,32.033 65.267,32.038 65.263,32.044 65.258,32.049 65.254,32.055 65.249,32.06 65.245,32.066 65.241,32.072 65.236,32.077 65.232,32.083 65.227,32.088 65.223,32.094 65.218,32.099 65.214,32.105 65.209,32.11 65.205,32.116 65.2,32.121 65.196,32.127 65.191,32.132 65.187,32.138 65.18,32.146 65.173,32.154 65.167,32.162 65.16,32.171 65.153,32.179 65.147,32.187 65.14,32.196 65.133,32.204 65.126,32.212 65.12,32.22 65.113,32.229 65.106,32.237 65.1,32.245 65.093,32.254 65.086,32.262 65.08,32.27 65.073,32.278 65.066,32.287 65.059,32.295 65.053,32.303 65.046,32.312 65.039,32.32 65.033,32.328 65.026,32.336 65.019,32.345 65.013,32.353 65.006,32.361 64.999,32.37 64.992,32.378 64.986,32.386 64.979,32.394 64.972,32.403 64.963,32.414 64.954,32.425 64.946,32.436 64.937,32.447 64.928,32.458 64.919,32.469 64.91,32.48 64.901,32.491 64.892,32.502 64.883,32.513 64.874,32.524 64.865,32.535 64.856,32.546 64.847,32.558 64.838,32.569 64.83,32.58 64.821,32.591 64.812,32.602 64.803,32.613 64.794,32.624 64.785,32.635 64.776,32.646 64.767,32.657 64.758,32.668 64.749,32.679 64.738,32.693 64.727,32.707 64.716,32.721 64.705,32.735 64.694,32.749 64.683,32.763 64.671,32.776 64.66,32.79 64.649,32.804 64.638,32.818 64.627,32.832 64.616,32.846 64.605,32.86 64.594,32.874 64.583,32.887 64.572,32.901 64.56,32.915 64.549,32.929 64.538,32.943 64.527,32.957 64.514,32.974 64.501,32.99 64.487,33.007 64.474,33.024 64.461,33.04 64.447,33.057 64.434,33.074 64.421,33.091 64.408,33.107 64.394,33.124 64.381,33.141 64.368,33.157 64.355,33.174 64.341,33.191 64.328,33.208 64.315,33.224 64.302,33.241 64.286,33.261 64.271,33.28 64.255,33.3 64.24,33.319 64.225,33.339 64.209,33.358 64.194,33.378 64.178,33.397 64.163,33.417 64.148,33.437 64.132,33.456 64.117,33.476 64.102,33.495 64.086,33.515 64.071,33.535 64.053,33.557 64.036,33.579 64.018,33.602 64.001,33.624 63.983,33.647 63.966,33.669 63.949,33.692 63.931,33.714 63.914,33.737 63.896,33.759 63.879,33.782 63.862,33.804 63.844,33.827 63.825,33.852 63.805,33.877 63.786,33.903 63.766,33.928 63.747,33.953 63.727,33.979 63.708,34.004 63.688,34.03 63.669,34.055 63.65,34.08 63.63,34.106 63.611,34.131 63.592,34.157 63.57,34.185 63.549,34.213 63.527,34.242 63.506,34.27 63.485,34.298 63.463,34.327 63.442,34.355 63.421,34.384 63.399,34.412 63.378,34.441 63.357,34.469 63.334,34.5 63.31,34.532 63.287,34.563 63.264,34.594 63.241,34.626 63.215,34.66 63.214,34.661 63.213,34.663 63.212,34.664 63.211,34.666 63.21,34.667 63.209,34.669 63.208,34.67 63.207,34.672 63.206,34.673 63.204,34.675 63.203,34.676 63.202,34.678 63.201,34.68 63.2,34.681 63.199,34.683 63.198,34.684 63.197,34.686 63.196,34.687 63.194,34.689 63.193,34.69 63.192,34.692 63.191,34.693 63.19,34.695 63.189,34.696 63.188,34.698 63.187,34.699 63.185,34.701 63.184,34.702 63.183,34.704 63.182,34.705 63.181,34.707 63.18,34.708 63.179,34.71 63.178,34.712 63.176,34.713 63.175,34.715 63.174,34.716 63.173,34.718 63.172,34.719 63.171,34.721 63.17,34.722 63.168,34.724 63.167,34.725 63.166,34.727 63.165,34.729 63.164,34.73 63.163,34.732 63.162,34.733 63.16,34.735 63.159,34.736 63.158,34.738 63.157,34.74 63.156,34.741 63.155,34.743 63.153,34.744 63.152,34.746 63.151,34.747 63.15,34.749 63.149,34.751 63.148,34.752 63.147,34.754 63.145,34.755 63.144,34.757 63.143,34.758 63.142,34.76 63.141,34.762 63.14,34.763 63.138,34.765 63.137,34.766 63.136,34.768 63.135,34.77 63.134,34.771 63.132,34.773 63.131,34.774 63.13,34.776 63.129,34.777 63.128,34.779 63.127,34.781 63.125,34.782 63.124,34.784 63.123,34.786 63.122,34.787 63.121,34.789 63.12,34.79 63.118,34.792 63.117,34.794 63.116,34.795 63.115,34.797 63.114,34.798 63.112,34.8 63.111,34.802 63.11,34.803 63.109,34.805 63.108,34.806 63.106,34.808 63.105,34.81 63.104,34.811 63.103,34.813 63.102,34.815 63.1,34.816 63.099,34.818 63.098,34.82 63.097,34.821 63.096,34.823 63.094,34.824 63.093,34.826 63.092,34.828 63.091,34.829 63.09,34.831 63.088,34.833 63.087,34.834 63.086,34.836 63.085,34.838 63.084,34.839 63.082,34.841 63.081,34.843 63.08,34.844 63.079,34.846 63.078,34.847 63.076,34.849 63.075,34.851 63.074,34.852 63.073,34.854 63.071,34.856 63.07,34.857 63.068,34.861 63.065,34.864 63.063,34.867 63.06,34.871 63.058,34.874 63.056,34.877 63.053,34.881 63.051,34.884 63.048,34.888 63.046,34.891 63.043,34.894 63.041,34.898 63.038,34.901 63.036,34.904 63.033,34.908 63.031,34.911 63.028,34.915 63.026,34.918 63.023,34.921 63.021,34.925 63.018,34.928 63.016,34.932 63.013,34.935 63.011,34.939 63.008,34.942 63.006,34.945 63.003,34.949 63.001,34.952 62.998,34.956 62.996,34.959 62.993,34.963 62.991,34.966 62.988,34.97 62.986,34.973 62.983,34.977 62.981,34.98 62.978,34.984 62.975,34.987 62.972,34.992 62.968,34.997 62.964,35.003 62.96,35.008 62.956,35.013 62.952,35.019 62.949,35.024 62.945,35.029 62.941,35.034 62.937,35.04 62.933,35.045 62.929,35.05 62.926,35.056 62.922,35.061 62.918,35.067 62.914,35.072 62.91,35.077 62.906,35.083 62.902,35.088 62.898,35.093 62.894,35.099 62.891,35.104 62.887,35.11 62.883,35.115 62.879,35.121 62.875,35.126 62.871,35.131 62.867,35.137 62.863,35.142 62.859,35.148 62.854,35.155 62.849,35.162 62.844,35.17 62.838,35.177 62.833,35.185 62.828,35.192 62.823,35.199 62.817,35.207 62.812,35.214 62.807,35.221 62.802,35.229 62.796,35.236 62.791,35.244 62.786,35.251 62.78,35.259 62.775,35.266 62.77,35.274 62.765,35.281 62.759,35.289 62.754,35.296 62.749,35.304 62.744,35.311 62.738,35.319 62.733,35.326 62.728,35.334 62.723,35.341 62.717,35.349 62.712,35.357 62.707,35.364 62.701,35.372 62.696,35.379 62.691,35.387 62.686,35.395 62.68,35.402 62.675,35.41 62.67,35.417 62.665,35.425 62.659,35.433 62.654,35.44 62.649,35.448 62.644,35.456 62.638,35.463 62.633,35.471 62.628,35.479 62.623,35.486 62.618,35.494 62.612,35.502 62.607,35.509 62.602,35.517 62.597,35.525 62.592,35.532 62.586,35.54 62.581,35.548 62.576,35.556 62.571,35.563 62.566,35.571 62.561,35.579 62.555,35.587 62.55,35.594 62.545,35.602 62.54,35.61 62.535,35.617 62.53,35.625 62.525,35.633 62.52,35.641 62.515,35.648 62.51,35.656 62.505,35.664 62.5,35.672 62.494,35.679 62.489,35.687 62.484,35.695 62.479,35.703 62.474,35.71 62.469,35.718 62.464,35.726 62.46,35.734 62.455,35.741 62.45,35.749 62.445,35.757 62.44,35.765 62.435,35.772 62.43,35.78 62.425,35.788 62.42,35.796 62.415,35.803 62.411,35.811 62.406,35.819 62.401,35.826 62.396,35.834 62.391,35.842 62.387,35.85 62.382,35.857 62.377,35.865 62.372,35.873 62.368,35.88 62.363,35.888 62.358,35.896 62.354,35.904 62.349,35.911 62.344,35.919 62.34,35.927 62.335,35.934 62.33,35.942 62.326,35.95 62.321,35.957 62.317,35.965 62.312,35.973 62.308,35.98 62.303,35.988 62.299,35.995 62.294,36.003 62.29,36.011 62.286,36.018 62.281,36.026 62.277,36.033 62.272,36.041 62.268,36.049 62.264,36.056 62.26,36.064 62.255,36.071 62.251,36.079 62.247,36.086 62.243,36.094 62.238,36.101 62.234,36.109 62.23,36.116 62.226,36.124 62.222,36.131 62.218,36.139 62.214,36.146 62.21,36.154 62.207,36.159 62.204,36.165 62.201,36.171 62.198,36.176 62.195,36.182 62.192,36.187 62.189,36.193 62.186,36.198 62.183,36.204 62.18,36.209 62.177,36.215 62.174,36.22 62.171,36.226 62.169,36.231 62.166,36.237 62.163,36.242 62.16,36.248 62.157,36.253 62.155,36.259 62.152,36.264 62.149,36.27 62.146,36.275 62.144,36.281 62.141,36.286 62.138,36.292 62.136,36.297 62.133,36.302 62.13,36.308 62.128,36.313 62.125,36.319 62.122,36.324 62.12,36.329 62.117,36.335 62.115,36.34 62.112,36.345 62.11,36.351 62.107,36.356 62.105,36.361 62.102,36.367 62.1,36.372 62.097,36.377 62.095,36.383 62.092,36.388 62.09,36.393 62.088,36.398 62.085,36.404 62.083,36.409 62.081,36.414 62.078,36.419 62.076,36.425 62.074,36.43 62.071,36.435 62.069,36.44 62.067,36.445 62.065,36.45 62.063,36.456 62.06,36.461 62.058,36.466 62.056,36.471 62.053,36.478 61.963,36.696 61.963,36.698 61.963,36.7 61.963,36.703 61.963,36.705 61.963,36.707 61.962,36.709 61.962,36.711 61.962,36.714 61.962,36.716 61.962,36.718 61.962,36.72 61.961,36.723 61.961,36.725 61.961,36.727 61.961,36.729 61.961,36.732 61.961,36.734 61.96,36.736 61.96,36.74 61.96,36.743 61.96,36.747 61.96,36.75 61.959,36.754 61.959,36.757 61.959,36.761 61.959,36.764 61.959,36.768 61.958,36.771 61.958,36.775 61.958,36.778 61.958,36.782 61.958,36.785 61.958,36.789 61.957,36.793 61.957,36.796 61.957,36.8 61.957,36.804 61.957,36.807 61.957,36.811 61.957,36.814 61.956,36.818 61.956,36.822 61.956,36.826 61.956,36.829 61.956,36.833 61.956,36.837 61.956,36.84 61.956,36.844 61.955,36.848 61.955,36.852 61.955,36.855 61.955,36.859 61.955,36.863 61.955,36.867 61.955,36.871 61.955,36.874 61.955,36.878 61.955,36.882 61.955,36.886 61.955,36.89 61.954,36.894 61.954,36.897 61.954,36.901 61.954,36.905 61.954,36.909 61.954,36.913 61.954,36.917 61.954,36.921 61.954,36.925 61.954,36.928 61.954,36.932 61.954,36.936 61.954,36.94 61.954,36.944 61.954,36.948 61.954,36.952 61.954,36.956 61.954,36.96 61.954,36.964 61.954,36.968 cw(c67.379,36.972) 61.954,36.972 61.954,36.976 61.954,36.98 61.954,36.984 61.954,36.988 61.954,36.992 61.954,36.996 61.954,37 61.954,37.004 61.954,37.008 61.954,37.012 61.954,37.016 61.954,37.02 61.954,37.024 61.954,37.028 61.954,37.032 61.954,37.037 61.954,37.041 61.954,37.045 61.954,37.049 61.954,37.053 61.954,37.057 61.955,37.061 61.955,37.065 61.955,37.069 61.955,37.073 61.955,37.077 61.955,37.082 61.955,37.086 61.955,37.09 61.955,37.094 61.955,37.098 61.955,37.102 61.955,37.106 61.955,37.111 61.956,37.115 61.956,37.119 61.956,37.123 61.956,37.127 61.956,37.131 61.956,37.135 61.956,37.14 61.956,37.144 61.956,37.148 61.956,37.152 61.957,37.156 61.957,37.16 61.957,37.165 61.957,37.169 61.957,37.173 61.957,37.177 61.957,37.181 61.957,37.187 61.958,37.193 61.958,37.198 61.958,37.204 61.958,37.209 61.958,37.213 61.958,37.218 61.959,37.222 61.959,37.226 61.959,37.23 61.959,37.234 61.959,37.239 61.959,37.243 61.959,37.247 61.96,37.251 61.96,37.255 61.96,37.26 61.96,37.264 61.96,37.268 61.96,37.272 61.961,37.276 61.961,37.281 61.961,37.285 61.961,37.289 61.961,37.293 61.961,37.297 61.962,37.302 61.962,37.306 61.962,37.31 61.962,37.314 61.962,37.318 61.962,37.323 61.963,37.327 61.963,37.331 61.963,37.335 61.963,37.339 61.963,37.344 61.963,37.348 61.964,37.352 61.964,37.356 61.964,37.36 61.964,37.364 61.964,37.369 61.965,37.373 61.965,37.377 61.965,37.381 61.965,37.385 61.965,37.389 61.966,37.394 61.966,37.398 61.966,37.402 61.966,37.406 61.966,37.41 61.967,37.414 61.967,37.418 61.967,37.423 61.967,37.427 61.967,37.431 61.968,37.435 61.968,37.439 61.968,37.443 61.968,37.447 61.968,37.451 61.969,37.455 61.969,37.46 61.969,37.464 61.969,37.468 61.969,37.472 61.97,37.476 61.97,37.48 61.97,37.484 61.97,37.487 61.97,37.489 61.971,37.492 61.971,37.495 61.971,37.498 61.971,37.5 61.971,37.503 61.971,37.506 61.971,37.508 61.972,37.511 61.972,37.514 61.972,37.516 61.972,37.519 61.972,37.522 61.972,37.524 61.972,37.527 61.973,37.53 61.973,37.532 61.973,37.535 61.973,37.538 61.973,37.54 61.973,37.543 61.973,37.546 61.974,37.548 61.974,37.551 61.974,37.554 61.974,37.556 61.974,37.559 61.974,37.562 61.975,37.564 61.975,37.567 61.975,37.57 61.975,37.572 61.975,37.575 61.975,37.577 61.975,37.58 61.976,37.583 61.976,37.585 61.976,37.588 61.976,37.591 61.976,37.593 61.976,37.596 61.976,37.598 61.977,37.601 61.977,37.602 61.977,37.604 61.977,37.605 61.977,37.606 61.977,37.607 61.977,37.609 61.977,37.61 61.977,37.611 61.977,37.613 61.977,37.614 61.977,37.615 61.977,37.616 61.978,37.618 61.978,37.619 61.978,37.62 61.978,37.622 61.978,37.623 61.978,37.624 61.978,37.625 61.978,37.627 61.978,37.628 61.978,37.629 61.978,37.631 61.978,37.632 61.978,37.633 61.978,37.634 61.979,37.636 61.979,37.637 61.979,37.638 61.979,37.639 61.979,37.641 61.979,37.642

## Polygon pours and split planes (outlines as drawn)
GND on Top Layer "NONET_L01_P024" (hatched 90Degree grid 0.5 track 0.2, shelved, pour order 24): 75.946,71.374 115.697,71.374 115.57,71.247 115.57,9.779 76.073,9.779

## Keep-outs
Keep-Out Layer:
  lines w0.7: 0,-0.381 0,85 150,85 150,0 0,0

## Other copper
Top Layer:
  region net VDD: 105.334,70.612 108.712,70.612 112.522,66.802 112.522,64.77 109.982,64.77 109.855,64.643 107.95,66.548 107.95,66.802 105.664,66.802 105.537,66.929 105.664,67.056 105.664,69.596 105.029,70.231

## Silkscreen, mask and mechanical layers (free items; w line width, h text height)
Bottom Overlay:
  drawing of 14186 lines, arcs and shapes, not listed
Bottom Solder:
  lines w0.2: 76.454,11.557 76.454,71.374 116.332,71.374 116.332,11.557 76.454,11.557

## Text inside footprints (layer, text, board x,y; h text height)
U2: Top Overlay "+" at 85.851,58.545 h0.81 r90; Top Overlay "-" at 88.141,58.544 h0.81 r90